# Altium PCB CMV4000.PcbDoc
Units mil, origin at the board's own origin, x right, y up, seen from the top; angles counter-clockwise.
Board outline 3836 x 6365.96 mil, 4 copper layers (LVDS, GND, VDD33, CMOS), stack 33.032 mil thick; 49 components, 45 nets, 1115 pads, 60 vias.
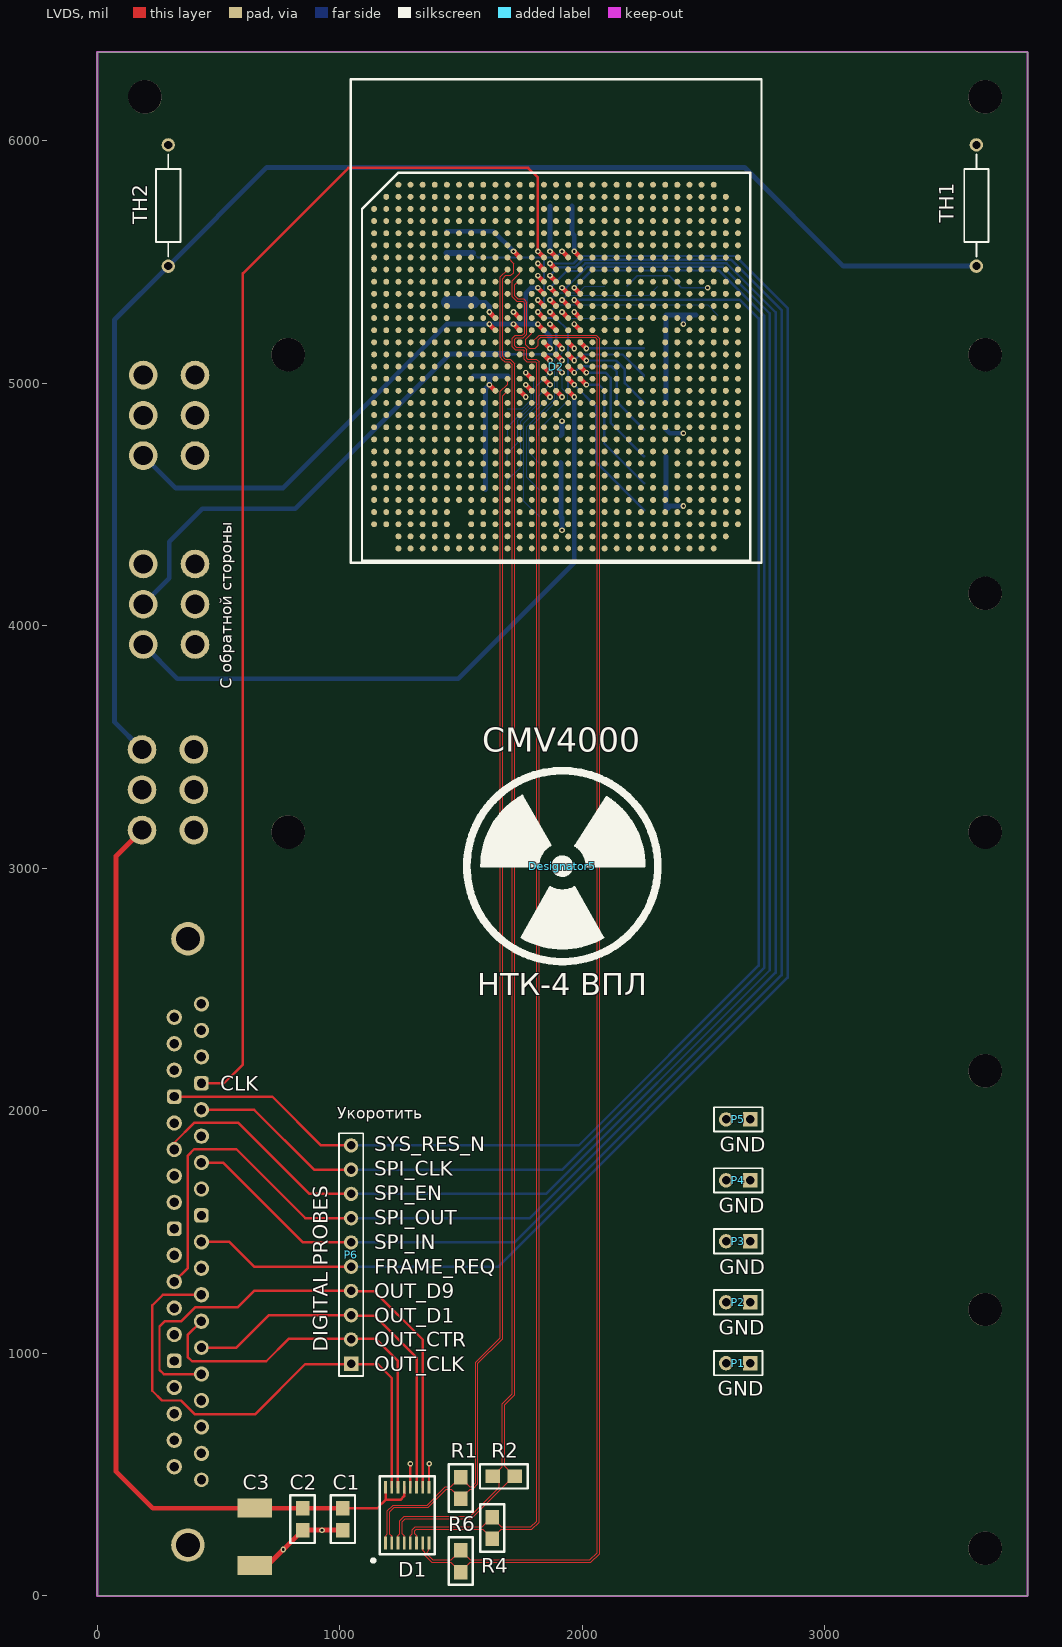
[diagram p0: LVDS view]
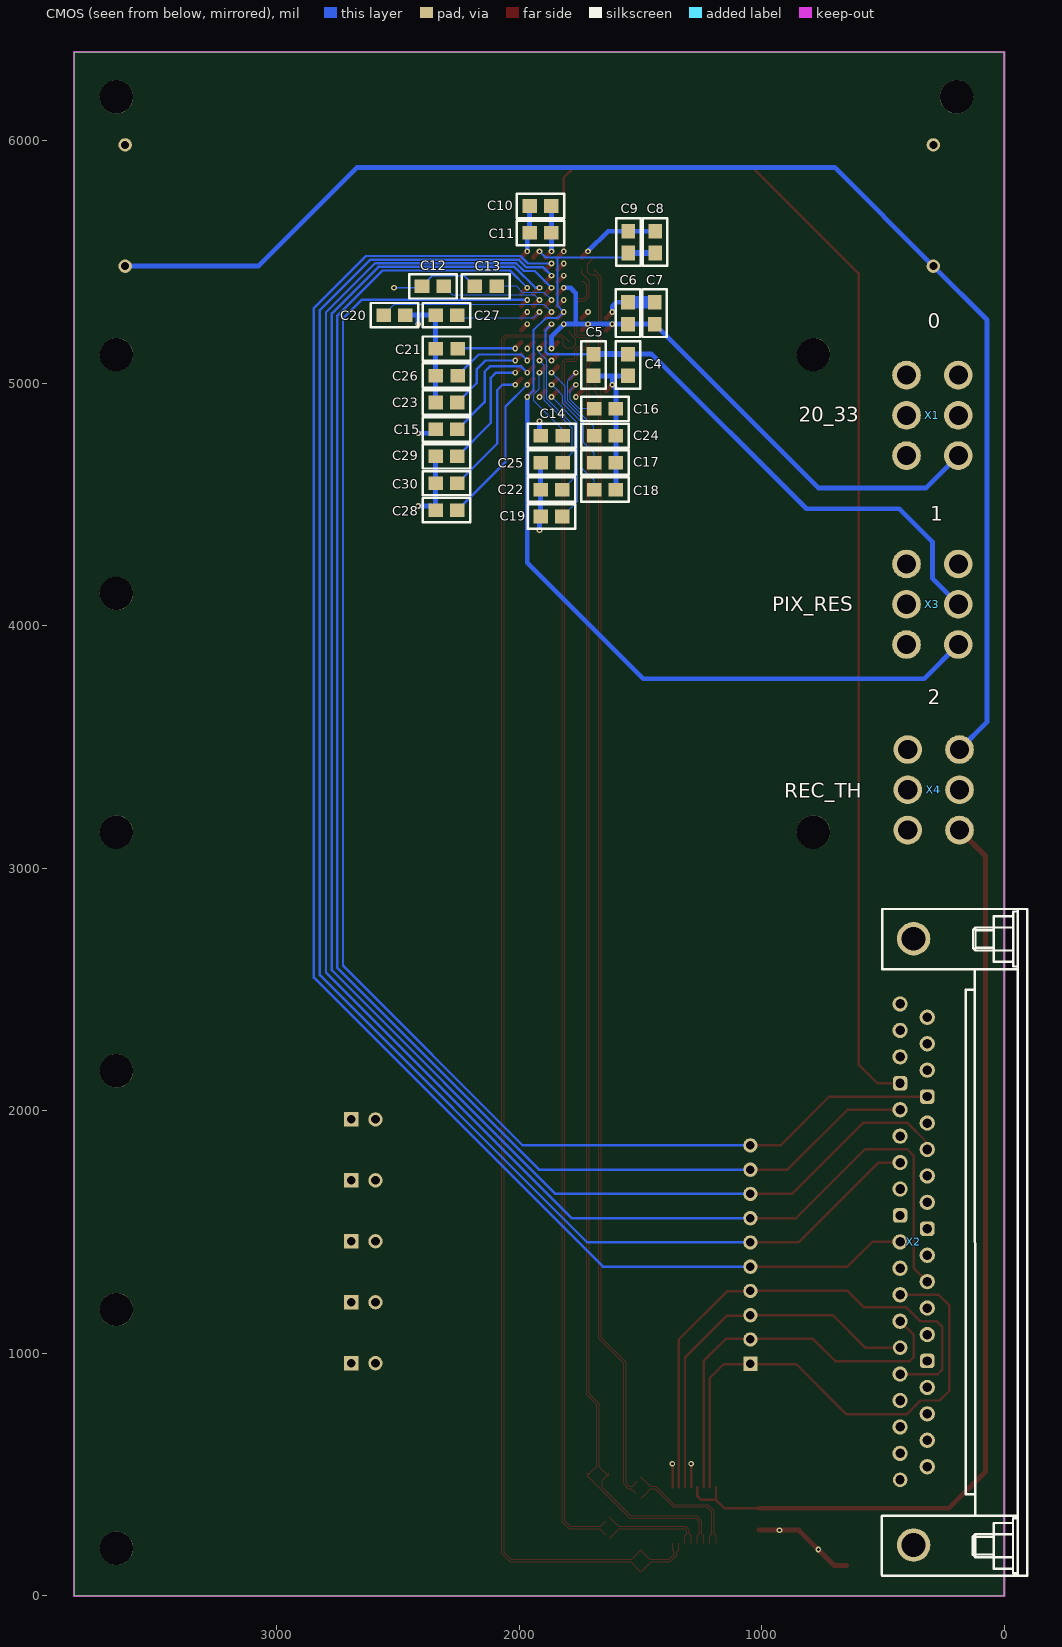
[diagram p1: CMOS view, seen from below]
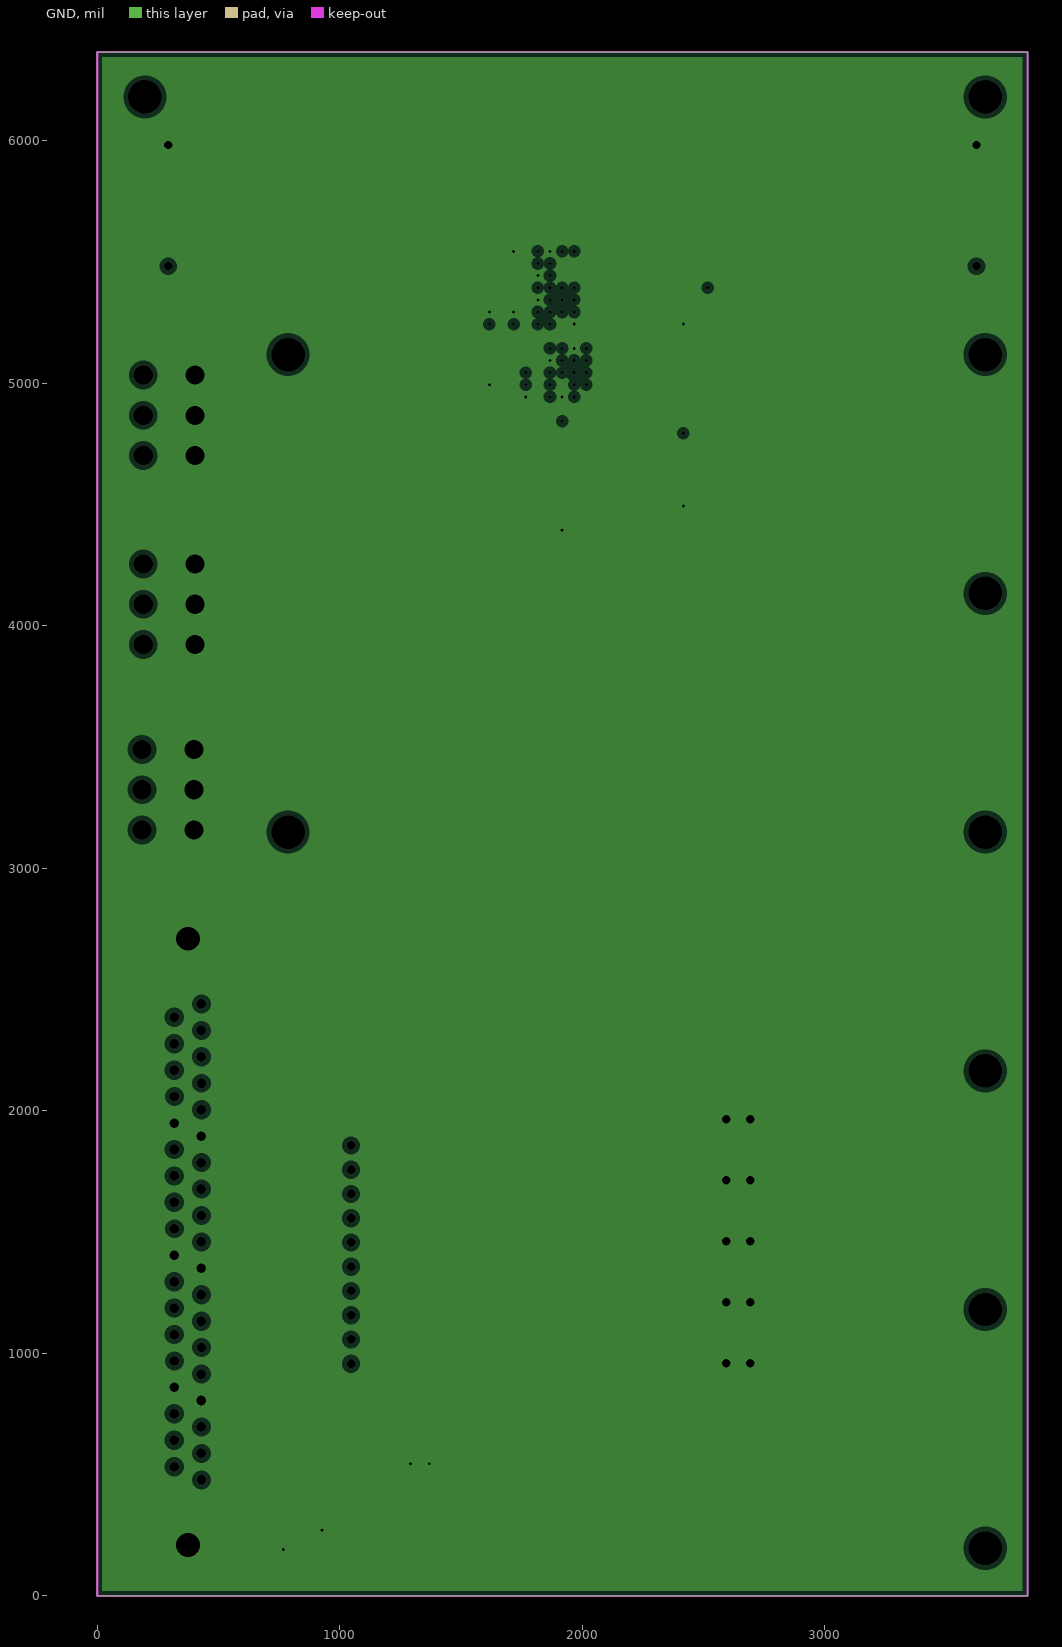
[diagram p2: GND, clearances drawn from the general rule]
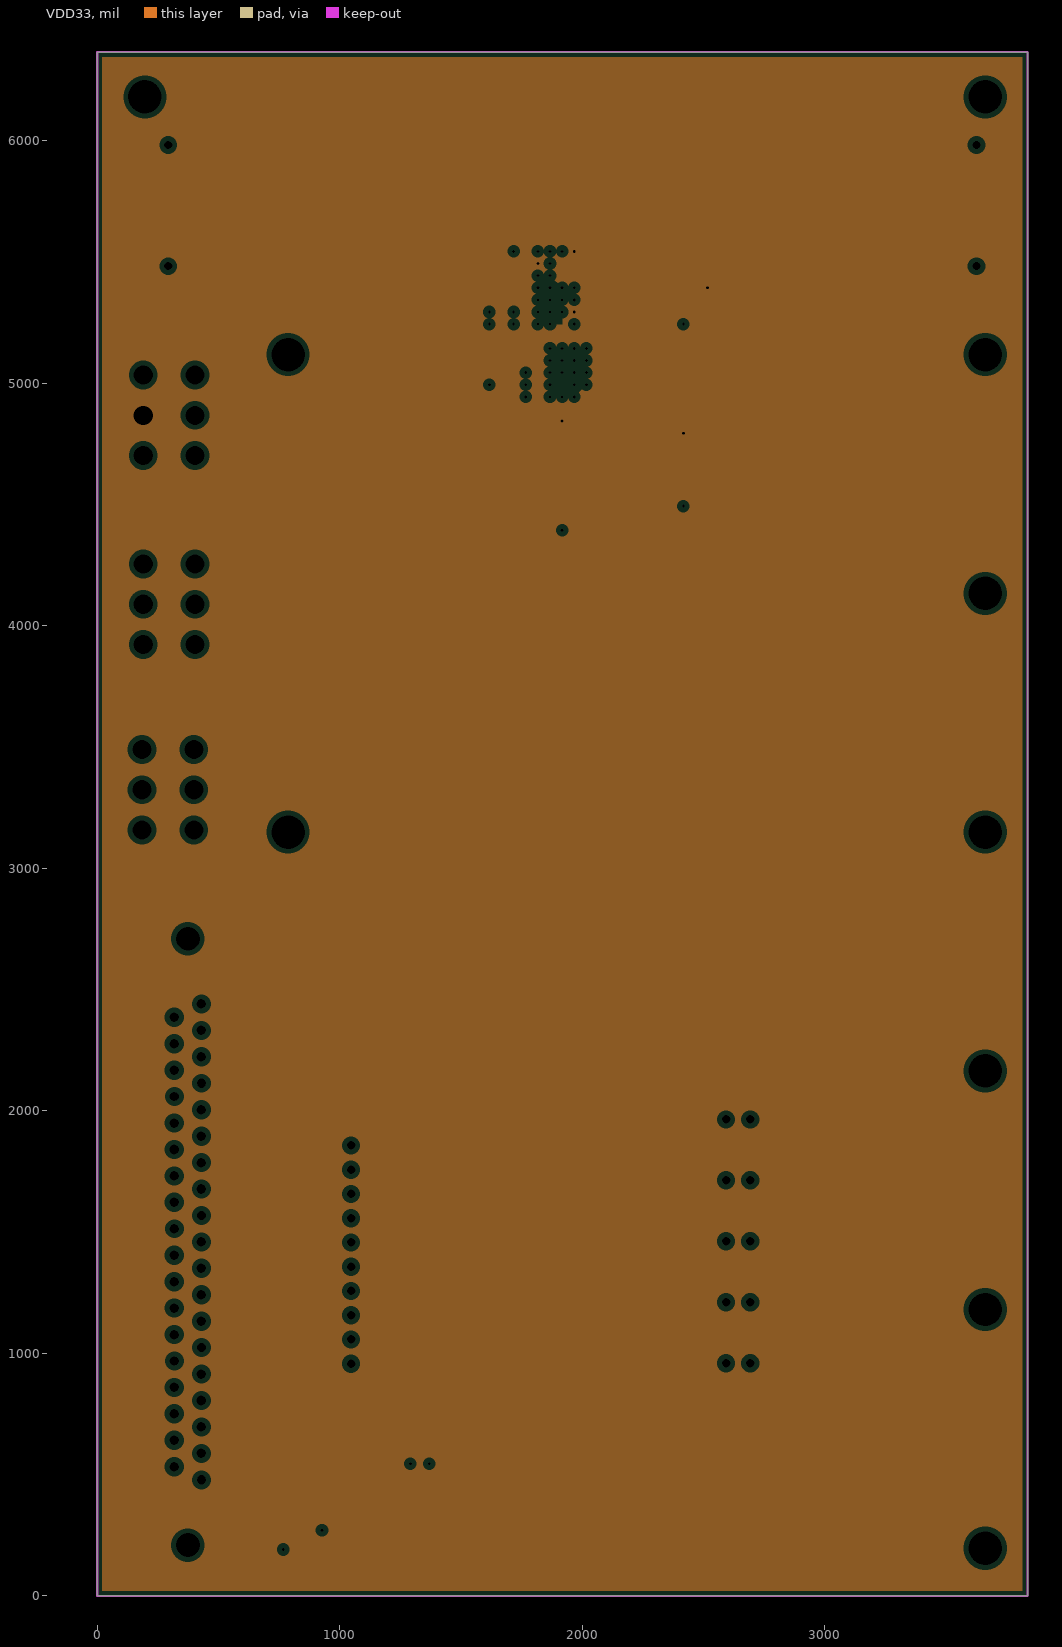
[diagram p3: VDD33, clearances drawn from the general rule]

## Layer stack, top to bottom
Top Solder: solder mask 0.4, Solder Resist, Dk 3.5
LVDS: signal copper 0.7087
Dielectric 1: core 5.9055, FR-4, Dk 4.6
GND: plane copper 0.7087, net GND
Dielectric 2: prepreg 5, FR-4, Dk 4.2
VDD33: plane copper 10, net VDD33
Dielectric4: core 10, FR-4, Dk 4.2
CMOS: signal copper 0.7087
Bottom Solder: solder mask 0.4, Solder Resist, Dk 3.5

## Board outline
0,0 3836,0 3836,6365.96 0,6365.96

## Design rules (kind name [scope] priority, off if disabled: settings)
Clearance [All] p1: gap=5
DiffPairsRouting [All] p1: maxlimit=10 minlimit=5 mostfreqgap=10 toplayer_maxgap=5 toplayer_prefgap=5 toplayer_minwidth=5 toplayer_maxwidth=5 toplayer_prefwidth=5 bottomlayer_mingap=10 bottomlayer_minwidth=15 bottomlayer_maxwidth=15 bottomlayer_prefwidth=15 maxuncoupledlength=500
HoleSize [All] p1: absolutevalues=TRUE maxlimit=808.66 minlimit=1 maxpercent=80.000 minpercent=20.000
MinimumSolderMaskSliver [All] p1: minsoldermaskwidth=0
PlaneClearance [All] p1: clearance=20
PlaneConnect [All] p1: planeconnectstyle=Relief reliefexpansion=20 reliefentries=4 reliefconductorwidth=10 reliefairgap=10
PolygonConnect [All] p1: connectstyle=Relief reliefconductorwidth=10 reliefentries=4 polygonreliefangle="90 Angle" airgapwidth=10
RoutingVias [All] p1: holewidth=11.81 width=23.62 viastyle="Through Hole" minholewidth=11.81 minwidth=23.62 maxholewidth=11.81 maxwidth=23.62
SolderMaskExpansion [All] p1: expansion=3.94
Width [All] p1: maxlimit=88.74 minlimit=4.92 preferedwidth=10 toplayer_prefwidth=5 bottomlayer_minwidth=5 minimp=50.000000 maximp=50.000000 favimp=50.000000
24 further rules are at their usual default settings.

## Classes and differential pairs
differential pair OUTCTR: +OUTCTR_P -OUTCTR_N
differential pair OUTCLK: +OUTCLK_P -OUTCLK_N
differential pair OUT9: +OUT9_P -OUT9_N
differential pair OUT1: +OUT1_P -OUT1_N

## Components (designator, comment, footprint, x,y, rotation, side; value= is the part's Value field where it differs from the comment)
C1 "0,01" CAP_SMALL 1063,218 r90 top
C2 "0,1" CAP_SMALL 897,218 r90 top
C3 "22,0" Cap_BIG 725,405 r180 top
C4 "0,1" CAP_SMALL 1502,4976.92 r90 bottom
C5 "0,01" CAP_SMALL 1644,4976.92 r90 bottom
C6 "0,1" CAP_SMALL 1602,5387.92 r270 bottom
C7 "0,01" CAP_SMALL 1492,5387.92 r270 bottom
C8 "0,1" CAP_SMALL 1490,5680.92 r270 bottom
C9 "0,01" CAP_SMALL 1600,5680.92 r270 bottom
C10 "0,1" CAP_SMALL 1814.08,5781 r0 bottom
C11 "0,01" CAP_SMALL 1814.08,5670 r0 bottom
C12 "0,1" CAP_SMALL 2455,5349.92 r180 bottom
C13 "0,1" CAP_SMALL 2237,5349.92 r180 bottom
C14 "0,1" CAP_SMALL 1965,4733.92 r180 bottom
C15 "0,1" CAP_SMALL 2399,4759.92 r180 bottom
C16 "0,1" CAP_SMALL 1548,4944.92 r0 bottom
C17 "0,1" CAP_SMALL 1548,4722.92 r0 bottom
C18 "0,1" CAP_SMALL 1548,4611.92 r0 bottom
C19 "0,1" CAP_SMALL 1966,4400.92 r180 bottom
C20 "0,1" CAP_SMALL 2416,5330.92 r0 bottom
C21 "0,1" CAP_SMALL 2398,5092.92 r180 bottom
C22 "0,1" CAP_SMALL 1966,4511.92 r180 bottom
C23 "0,1" CAP_SMALL 2399,4870.92 r180 bottom
C24 "0,1" CAP_SMALL 1548,4833.92 r0 bottom
C25 "0,1" CAP_SMALL 1965,4622.92 r180 bottom
C26 "0,1" CAP_SMALL 2398,4981.92 r180 bottom
C27 "0,1" CAP_SMALL 2399,5230.92 r180 bottom
C28 "0,1" CAP_SMALL 2399,4426.92 r180 bottom
C29 "0,1" CAP_SMALL 2399,4648.92 r180 bottom
C30 "0,1" CAP_SMALL 2399,4537.92 r180 bottom
D1 "SN65LVDS048A" "SN65LVDS048A (4LVDS)" 1189,218 r0 top
D2 "CMV4000" SOCKET_AM2 1192,5768.92 r0 top
Designator5 "Comment" RADIATION 1918,3009 r0 top
P1 "GND" HDR1X2 2693,960 r180 top
P2 "GND" HDR1X2 2693,1211.25 r180 top
P3 "GND" HDR1X2 2693,1462.5 r180 top
P4 "GND" HDR1X2 2693,1713.75 r180 top
P5 "GND" HDR1X2 2693,1965 r180 top
P6 "DIGITAL PROBES" HDR1X10 1047,957.82 r90 top
R1 "100" RES 1548,543 r180 top
R2 "100" RES 1579,542.24 r270 top
R4 "100" RES 1678,378 r180 top
R6 "100" RES 1450,46 r0 top
TH1 "Res Semi" AXIAL-0.5 3625,5733 r90 top
TH2 "Res Semi" AXIAL-0.5 293,5733 r90 top
X1 "20_33" POWER 490,4868 r270 bottom
X2 "FEMALE" CHEAP_CONN_FEMALE 374,2710 r270 bottom
X3 "PIX_RES" POWER 490,4089 r270 bottom
X4 "REC_TH" POWER 485,3324 r270 bottom

## Footprints (in the part's own frame and the unit in brackets; to place one, negate y for a bottom-side part, rotate by r counter-clockwise, add the part's x,y. Pads: shape width x height; smd on the part's side, far side on the other; paste and mask are expansions set on the pad)
AXIAL-0.5 [mm] "Axial Device, Thru-Hole; 2 Leads; 0.5 in Pin Spacing"
  round 1.4 hole 0.85: 1(-6.35,0) 2(6.35,0)
  silkscreen extent -5.33,-1.27 5.33,1.27
Cap_BIG [mm] "FROM_MAX"
  rect 3.6x2 smd: 1(1.905,7.092) 2(1.905,1.092)
  body extent 0,-0.01 3.81,8.19, height 2.54
CAP_SMALL [mil] "FROM_MAX"
  rect 60x55.98 smd: 1(53.71,50) 2(143.71,50)
  silkscreen extent 1,0 197,100, body extent 20,18 178,82, height 100
CHEAP_CONN_FEMALE [mm] "CHEAP_CONN_FEMALE"
  round 1.6 hole 1: 1(6.833,-1.422) 2(9.601,-1.422) 3(12.37,-1.422) 5(17.907,-1.422) 6(20.676,-1.422) 7(23.444,-1.422) 8(26.213,-1.422) 10(31.75,-1.422) 11(34.519,-1.422) 12(37.287,-1.422) 13(40.056,-1.422) 15(45.593,-1.422) 16(48.362,-1.422) 17(51.13,-1.422) 18(53.899,-1.422) 20(8.23,1.422) 21(10.998,1.422) 22(13.767,1.422) 24(19.304,1.422) 25(22.073,1.422) 26(24.841,1.422) 27(27.61,1.422) 29(33.147,1.422) 30(35.916,1.422) 31(38.684,1.422) 32(41.453,1.422) 34(46.99,1.422) 35(49.759,1.422) 36(52.527,1.422) 37(55.296,1.422)
  rrect50% 1.524x1.524 hole 0.965: 4(15.138,-1.422) 9(28.981,-1.422) 23(16.535,1.422) 28(30.378,1.422) 33(44.221,1.422)
  round 1.524 hole 0.965: 14(42.824,-1.422) 19(56.667,-1.422)
  round 3.5 hole 2.5: 38(0,0) 39(63.5,0)
  silkscreen extent -3.11,-3.36 66.72,11.92
HDR1X2 [mm] "Connector; Header; 2 Position"
  rect 1.5x1.5 hole 0.9: 1(0,0)
  round 1.5 hole 0.9: 2(2.54,0)
  silkscreen extent -1.27,-1.27 3.81,1.27
HDR1X10 [mm] "Connector; Header; 10 Position"
  rect 1.5x1.5 hole 0.9: 1(0,0)
  round 1.5 hole 0.9: 2(2.54,0) 3(5.08,0) 4(7.62,0) 5(10.16,0) 6(12.7,0) 7(15.24,0) 8(17.78,0) 9(20.32,0) 10(22.86,0)
  silkscreen extent -1.27,-1.27 24.13,1.27
POWER [mm] "POWER"
  round 3 hole 2: 1(4.217,7.62) 2(0,7.62) 3(-4.217,7.62) 4(4.217,2.198) 5(0,2.198) 6(-4.217,2.198)
RADIATION [mil]
  silkscreen extent -394,-394 394,394
RES [mil] "FROM_MAX"
  rect 55.98x60 smd: 1(49,52.71) 2(49,142.71)
  silkscreen extent -1,0 99,196, body extent 17,19 81,177, height 100
"SN65LVDS048A (4LVDS)" [mm]
  rect 0.28x1.35 smd: 1(0,0) 2(0.65,0) 3(1.3,0) 4(1.95,0) 5(2.6,0) 6(3.25,0) 7(3.9,0) 8(4.55,0) 9(4.55,5.85) 10(3.9,5.85) 11(3.25,5.85) 12(2.6,5.85) 13(1.95,5.85) 14(1.3,5.85) 15(0.65,5.85) 16(0,5.85)
  silkscreen extent -1.49,-2.03 5.18,7
SOCKET_AM2 [mm]
  round 0.62 smd: A3(1.27,1.27) A4(2.54,1.27) A5(3.81,1.27) A6(5.08,1.27) A7(6.35,1.27) A8(7.62,1.27) A9(8.89,1.27) A10(10.16,1.27) A11(11.43,1.27) A12(12.7,1.27) A13(13.97,1.27) A14(15.24,1.27) A15(16.51,1.27) A16(17.78,1.27) A17(19.05,1.27) A18(20.32,1.27) A19(21.59,1.27) A20(22.86,1.27) A21(24.13,1.27) A22(25.4,1.27) A23(26.67,1.27) A24(27.94,1.27) A25(29.21,1.27) A26(30.48,1.27) A27(31.75,1.27) A28(33.02,1.27) A29(34.29,1.27) AA1(-1.27,-24.13) AA2(0,-24.13) AA3(1.27,-24.13) AA4(2.54,-24.13) AA5(3.81,-24.13) AA6(5.08,-24.13) AA7(6.35,-24.13) AA8(7.62,-24.13) AA9(8.89,-24.13) AA10(10.16,-24.13) AA11(11.43,-24.13) AA12(12.7,-24.13) AA13(13.97,-24.13) AA14(15.24,-24.13) AA15(16.51,-24.13) AA16(17.78,-24.13) AA17(19.05,-24.13) AA18(20.32,-24.13) AA19(21.59,-24.13) AA20(22.86,-24.13) AA21(24.13,-24.13) AA22(25.4,-24.13) AA23(26.67,-24.13) AA24(27.94,-24.13) AA25(29.21,-24.13) AA26(30.48,-24.13) AA27(31.75,-24.13) AA28(33.02,-24.13) AA29(34.29,-24.13) AA30(35.56,-24.13) AA31(36.83,-24.13) AB1(-1.27,-25.4) AB2(0,-25.4) AB3(1.27,-25.4) AB4(2.54,-25.4) AB5(3.81,-25.4) AB6(5.08,-25.4) AB7(6.35,-25.4) AB8(7.62,-25.4) AB9(8.89,-25.4) AB10(10.16,-25.4) AB11(11.43,-25.4) AB12(12.7,-25.4) AB13(13.97,-25.4) AB14(15.24,-25.4) AB15(16.51,-25.4) AB16(17.78,-25.4) AB17(19.05,-25.4) AB18(20.32,-25.4) AB19(21.59,-25.4) AB20(22.86,-25.4) AB21(24.13,-25.4) AB22(25.4,-25.4) AB23(26.67,-25.4) AB24(27.94,-25.4) AB25(29.21,-25.4) AB26(30.48,-25.4) AB27(31.75,-25.4) AB28(33.02,-25.4) AB29(34.29,-25.4) AB30(35.56,-25.4) AB31(36.83,-25.4) AC1(-1.27,-26.67) AC2(0,-26.67) AC3(1.27,-26.67) AC4(2.54,-26.67) AC5(3.81,-26.67) AC6(5.08,-26.67) AC7(6.35,-26.67) AC8(7.62,-26.67) AC9(8.89,-26.67) AC10(10.16,-26.67) AC11(11.43,-26.67) AC12(12.7,-26.67) AC13(13.97,-26.67) AC14(15.24,-26.67) AC15(16.51,-26.67) AC16(17.78,-26.67) AC17(19.05,-26.67) AC18(20.32,-26.67) AC19(21.59,-26.67) AC20(22.86,-26.67) AC21(24.13,-26.67) AC22(25.4,-26.67) AC23(26.67,-26.67) AC24(27.94,-26.67) AC25(29.21,-26.67) AC26(30.48,-26.67) AC27(31.75,-26.67) AC28(33.02,-26.67) AC29(34.29,-26.67) AC30(35.56,-26.67) AC31(36.83,-26.67) AD1(-1.27,-27.94) AD2(0,-27.94) AD3(1.27,-27.94) AD4(2.54,-27.94) AD5(3.81,-27.94) AD6(5.08,-27.94) AD7(6.35,-27.94) AD8(7.62,-27.94) AD9(8.89,-27.94) AD10(10.16,-27.94) AD11(11.43,-27.94) AD12(12.7,-27.94) AD13(13.97,-27.94) AD14(15.24,-27.94) AD15(16.51,-27.94) AD16(17.78,-27.94) AD17(19.05,-27.94) AD18(20.32,-27.94) AD19(21.59,-27.94) AD20(22.86,-27.94) AD21(24.13,-27.94) AD22(25.4,-27.94) AD23(26.67,-27.94) AD24(27.94,-27.94) AD26(30.48,-27.94) AD27(31.75,-27.94) AD28(33.02,-27.94) AD29(34.29,-27.94) AD30(35.56,-27.94) AD31(36.83,-27.94) AE1(-1.27,-29.21) AE2(0,-29.21) AE3(1.27,-29.21) AE4(2.54,-29.21) AE5(3.81,-29.21) AE6(5.08,-29.21) AE7(6.35,-29.21) AE8(7.62,-29.21) AE9(8.89,-29.21) AE10(10.16,-29.21) AE11(11.43,-29.21) AE12(12.7,-29.21) AE13(13.97,-29.21) AE14(15.24,-29.21) AE15(16.51,-29.21) AE16(17.78,-29.21) AE17(19.05,-29.21) AE18(20.32,-29.21) AE19(21.59,-29.21) AE20(22.86,-29.21) AE21(24.13,-29.21) AE22(25.4,-29.21) AE23(26.67,-29.21) AE24(27.94,-29.21) AE26(30.48,-29.21) AE27(31.75,-29.21) AE28(33.02,-29.21) AE29(34.29,-29.21) AE30(35.56,-29.21) AE31(36.83,-29.21) AF1(-1.27,-30.48) AF2(0,-30.48) AF3(1.27,-30.48) AF4(2.54,-30.48) AF5(3.81,-30.48) AF6(5.08,-30.48) AF7(6.35,-30.48) AF8(7.62,-30.48) AF9(8.89,-30.48) AF10(10.16,-30.48) AF11(11.43,-30.48) AF12(12.7,-30.48) AF13(13.97,-30.48) AF14(15.24,-30.48) AF15(16.51,-30.48) AF16(17.78,-30.48) AF17(19.05,-30.48) AF18(20.32,-30.48) AF19(21.59,-30.48) AF20(22.86,-30.48) AF21(24.13,-30.48) AF22(25.4,-30.48) AF23(26.67,-30.48) AF24(27.94,-30.48) AF25(29.21,-30.48) AF26(30.48,-30.48) AF27(31.75,-30.48) AF28(33.02,-30.48) AF29(34.29,-30.48) AF30(35.56,-30.48) AF31(36.83,-30.48) AG1(-1.27,-31.75) AG2(0,-31.75) AG3(1.27,-31.75) AG4(2.54,-31.75) AG5(3.81,-31.75) AG6(5.08,-31.75) AG7(6.35,-31.75) AG8(7.62,-31.75) AG9(8.89,-31.75) AG10(10.16,-31.75) AG11(11.43,-31.75) AG12(12.7,-31.75) AG13(13.97,-31.75) AG14(15.24,-31.75) AG15(16.51,-31.75) AG16(17.78,-31.75) AG17(19.05,-31.75) AG18(20.32,-31.75) AG19(21.59,-31.75) AG20(22.86,-31.75) AG21(24.13,-31.75) AG22(25.4,-31.75) AG23(26.67,-31.75) AG24(27.94,-31.75) AG25(29.21,-31.75) AG26(30.48,-31.75) AG27(31.75,-31.75) AG28(33.02,-31.75) AG29(34.29,-31.75) AG30(35.56,-31.75) AG31(36.83,-31.75) AH1(-1.27,-33.02) AH2(0,-33.02) AH3(1.27,-33.02) AH4(2.54,-33.02) AH5(3.81,-33.02) AH6(5.08,-33.02) AH7(6.35,-33.02) AH9(8.89,-33.02) AH10(10.16,-33.02) AH11(11.43,-33.02) AH12(12.7,-33.02) AH13(13.97,-33.02) AH14(15.24,-33.02) AH15(16.51,-33.02) AH16(17.78,-33.02) AH17(19.05,-33.02) AH18(20.32,-33.02) AH19(21.59,-33.02) AH20(22.86,-33.02) AH21(24.13,-33.02) AH22(25.4,-33.02) AH23(26.67,-33.02) AH24(27.94,-33.02) AH25(29.21,-33.02) AH26(30.48,-33.02) AH27(31.75,-33.02) AH28(33.02,-33.02) AH29(34.29,-33.02) AH30(35.56,-33.02) AH31(36.83,-33.02) AJ1(-1.27,-34.29) AJ2(0,-34.29) AJ3(1.27,-34.29) AJ4(2.54,-34.29) AJ5(3.81,-34.29) AJ6(5.08,-34.29) AJ7(6.35,-34.29) AJ9(8.89,-34.29) AJ10(10.16,-34.29) AJ11(11.43,-34.29) AJ12(12.7,-34.29) AJ13(13.97,-34.29) AJ14(15.24,-34.29) AJ15(16.51,-34.29) AJ16(17.78,-34.29) AJ17(19.05,-34.29) AJ18(20.32,-34.29) AJ19(21.59,-34.29) AJ20(22.86,-34.29) AJ21(24.13,-34.29) AJ22(25.4,-34.29) AJ23(26.67,-34.29) AJ24(27.94,-34.29) AJ25(29.21,-34.29) AJ26(30.48,-34.29) AJ27(31.75,-34.29) AJ28(33.02,-34.29) AJ29(34.29,-34.29) AJ30(35.56,-34.29) AJ31(36.83,-34.29) AK3(1.27,-35.56) AK4(2.54,-35.56) AK5(3.81,-35.56) AK6(5.08,-35.56) AK7(6.35,-35.56) AK8(7.62,-35.56) AK9(8.89,-35.56) AK10(10.16,-35.56) AK11(11.43,-35.56) AK12(12.7,-35.56) AK13(13.97,-35.56) AK14(15.24,-35.56) AK15(16.51,-35.56) AK16(17.78,-35.56) AK17(19.05,-35.56) AK18(20.32,-35.56) AK19(21.59,-35.56) AK20(22.86,-35.56) AK21(24.13,-35.56) AK22(25.4,-35.56) AK23(26.67,-35.56) AK24(27.94,-35.56) AK25(29.21,-35.56) AK26(30.48,-35.56) AK27(31.75,-35.56) AK28(33.02,-35.56) AK29(34.29,-35.56) AK30(35.56,-35.56) AL3(1.27,-36.83) AL4(2.54,-36.83) AL5(3.81,-36.83) AL6(5.08,-36.83) AL7(6.35,-36.83) AL8(7.62,-36.83) AL9(8.89,-36.83) AL10(10.16,-36.83) AL11(11.43,-36.83) AL12(12.7,-36.83) AL13(13.97,-36.83) AL14(15.24,-36.83) AL15(16.51,-36.83) AL16(17.78,-36.83) AL17(19.05,-36.83) AL18(20.32,-36.83) AL19(21.59,-36.83) AL20(22.86,-36.83) AL21(24.13,-36.83) AL22(25.4,-36.83) AL23(26.67,-36.83) AL24(27.94,-36.83) AL25(29.21,-36.83) AL26(30.48,-36.83) AL27(31.75,-36.83) AL28(33.02,-36.83) AL29(34.29,-36.83) B2(0,0) B3(1.27,0) B4(2.54,0) B5(3.81,0) B6(5.08,0) B7(6.35,0) B8(7.62,0) B9(8.89,0) B10(10.16,0) B11(11.43,0) B12(12.7,0) B13(13.97,0) B14(15.24,0) B15(16.51,0) B16(17.78,0) B17(19.05,0) B18(20.32,0) B19(21.59,0) B20(22.86,0) B21(24.13,0) B22(25.4,0) B23(26.67,0) B24(27.94,0) B25(29.21,0) B26(30.48,0) B27(31.75,0) B28(33.02,0) B29(34.29,0) B30(35.56,0) C1(-1.27,-1.27) C2(0,-1.27) C3(1.27,-1.27) C4(2.54,-1.27) C5(3.81,-1.27) C6(5.08,-1.27) C7(6.35,-1.27) C8(7.62,-1.27) C9(8.89,-1.27) C10(10.16,-1.27) C11(11.43,-1.27) C12(12.7,-1.27) C13(13.97,-1.27) C14(15.24,-1.27) C15(16.51,-1.27) C16(17.78,-1.27) C17(19.05,-1.27) C18(20.32,-1.27) C19(21.59,-1.27) C20(22.86,-1.27) C21(24.13,-1.27) C22(25.4,-1.27) C23(26.67,-1.27) C24(27.94,-1.27) C25(29.21,-1.27) C26(30.48,-1.27) C27(31.75,-1.27) C28(33.02,-1.27) C29(34.29,-1.27) C30(35.56,-1.27) C31(36.83,-1.27) D1(-1.27,-2.54) D2(0,-2.54) D3(1.27,-2.54) D4(2.54,-2.54) D5(3.81,-2.54) D6(5.08,-2.54) D7(6.35,-2.54) D8(7.62,-2.54) D9(8.89,-2.54) D10(10.16,-2.54) D11(11.43,-2.54) D12(12.7,-2.54) D13(13.97,-2.54) D14(15.24,-2.54) D15(16.51,-2.54) D16(17.78,-2.54) D17(19.05,-2.54) D18(20.32,-2.54) D19(21.59,-2.54) D20(22.86,-2.54) D21(24.13,-2.54) D22(25.4,-2.54) D23(26.67,-2.54) D24(27.94,-2.54) D25(29.21,-2.54) D26(30.48,-2.54) D27(31.75,-2.54) D28(33.02,-2.54) D29(34.29,-2.54) D30(35.56,-2.54) D31(36.83,-2.54) E1(-1.27,-3.81) E2(0,-3.81) E3(1.27,-3.81) E4(2.54,-3.81) E5(3.81,-3.81) E6(5.08,-3.81) E7(6.35,-3.81) E8(7.62,-3.81) E9(8.89,-3.81) E10(10.16,-3.81) E11(11.43,-3.81) E12(12.7,-3.81) E13(13.97,-3.81) E14(15.24,-3.81) E15(16.51,-3.81) E16(17.78,-3.81) E17(19.05,-3.81) E18(20.32,-3.81) E19(21.59,-3.81) E20(22.86,-3.81) E21(24.13,-3.81) E22(25.4,-3.81) E23(26.67,-3.81) E24(27.94,-3.81) E25(29.21,-3.81) E26(30.48,-3.81) E27(31.75,-3.81) E28(33.02,-3.81) E29(34.29,-3.81) E30(35.56,-3.81) E31(36.83,-3.81) F1(-1.27,-5.08) F2(0,-5.08) F3(1.27,-5.08) F4(2.54,-5.08) F5(3.81,-5.08) F6(5.08,-5.08) F7(6.35,-5.08) F8(7.62,-5.08) F9(8.89,-5.08) F10(10.16,-5.08) F11(11.43,-5.08) F12(12.7,-5.08) F13(13.97,-5.08) F14(15.24,-5.08) F15(16.51,-5.08) F16(17.78,-5.08) F17(19.05,-5.08) F18(20.32,-5.08) F19(21.59,-5.08) F20(22.86,-5.08) F21(24.13,-5.08) F22(25.4,-5.08) F23(26.67,-5.08) F24(27.94,-5.08) F25(29.21,-5.08) F26(30.48,-5.08) F27(31.75,-5.08) F28(33.02,-5.08) F29(34.29,-5.08) F30(35.56,-5.08) F31(36.83,-5.08) G1(-1.27,-6.35) G2(0,-6.35) G3(1.27,-6.35) G4(2.54,-6.35) G5(3.81,-6.35) G6(5.08,-6.35) G7(6.35,-6.35) G8(7.62,-6.35) G9(8.89,-6.35) G10(10.16,-6.35) G11(11.43,-6.35) G12(12.7,-6.35) G13(13.97,-6.35) G14(15.24,-6.35) G15(16.51,-6.35) G16(17.78,-6.35) G17(19.05,-6.35) G18(20.32,-6.35) G19(21.59,-6.35) G20(22.86,-6.35) G21(24.13,-6.35) G22(25.4,-6.35) G23(26.67,-6.35) G24(27.94,-6.35) G25(29.21,-6.35) G26(30.48,-6.35) G27(31.75,-6.35) G28(33.02,-6.35) G29(34.29,-6.35) G30(35.56,-6.35) G31(36.83,-6.35) H1(-1.27,-7.62) H2(0,-7.62) H3(1.27,-7.62) H4(2.54,-7.62) H5(3.81,-7.62) H6(5.08,-7.62) H7(6.35,-7.62) H8(7.62,-7.62) H9(8.89,-7.62) H10(10.16,-7.62) H11(11.43,-7.62) H12(12.7,-7.62) H13(13.97,-7.62) H14(15.24,-7.62) H15(16.51,-7.62) H16(17.78,-7.62) H17(19.05,-7.62) H18(20.32,-7.62) H19(21.59,-7.62) H20(22.86,-7.62) H21(24.13,-7.62) H22(25.4,-7.62) H23(26.67,-7.62) H24(27.94,-7.62) H25(29.21,-7.62) H26(30.48,-7.62) H27(31.75,-7.62) H28(33.02,-7.62) H29(34.29,-7.62) H30(35.56,-7.62) H31(36.83,-7.62) J1(-1.27,-8.89) J2(0,-8.89) J3(1.27,-8.89) J4(2.54,-8.89) J5(3.81,-8.89) J6(5.08,-8.89) J7(6.35,-8.89) J8(7.62,-8.89) J9(8.89,-8.89) J10(10.16,-8.89) J11(11.43,-8.89) J12(12.7,-8.89) J13(13.97,-8.89) J14(15.24,-8.89) J15(16.51,-8.89) J16(17.78,-8.89) J17(19.05,-8.89) J18(20.32,-8.89) J19(21.59,-8.89) J20(22.86,-8.89) J21(24.13,-8.89) J22(25.4,-8.89) J23(26.67,-8.89) J24(27.94,-8.89) J25(29.21,-8.89) J26(30.48,-8.89) J27(31.75,-8.89) J28(33.02,-8.89) J29(34.29,-8.89) J30(35.56,-8.89) J31(36.83,-8.89) K1(-1.27,-10.16) K2(0,-10.16) K3(1.27,-10.16) K4(2.54,-10.16) K5(3.81,-10.16) K6(5.08,-10.16) K7(6.35,-10.16) K8(7.62,-10.16) K9(8.89,-10.16) K10(10.16,-10.16) K11(11.43,-10.16) K12(12.7,-10.16) K13(13.97,-10.16) K14(15.24,-10.16) K15(16.51,-10.16) K16(17.78,-10.16) K17(19.05,-10.16) K18(20.32,-10.16) K19(21.59,-10.16) K20(22.86,-10.16) K21(24.13,-10.16) K22(25.4,-10.16) K23(26.67,-10.16) K24(27.94,-10.16) K25(29.21,-10.16) K26(30.48,-10.16) K27(31.75,-10.16) K28(33.02,-10.16) K29(34.29,-10.16) K30(35.56,-10.16) K31(36.83,-10.16) L1(-1.27,-11.43) L2(0,-11.43) L3(1.27,-11.43) L4(2.54,-11.43) L5(3.81,-11.43) L6(5.08,-11.43) L7(6.35,-11.43) L9(8.89,-11.43) L10(10.16,-11.43) L11(11.43,-11.43) L12(12.7,-11.43) L13(13.97,-11.43) L14(15.24,-11.43) L15(16.51,-11.43) L16(17.78,-11.43) L17(19.05,-11.43) L18(20.32,-11.43) L19(21.59,-11.43) L20(22.86,-11.43) L21(24.13,-11.43) L22(25.4,-11.43) L23(26.67,-11.43) L24(27.94,-11.43) L25(29.21,-11.43) L26(30.48,-11.43) L27(31.75,-11.43) L28(33.02,-11.43) L29(34.29,-11.43) L30(35.56,-11.43) L31(36.83,-11.43) M1(-1.27,-12.7) M2(0,-12.7) M3(1.27,-12.7) M4(2.54,-12.7) M5(3.81,-12.7) M6(5.08,-12.7) M7(6.35,-12.7) M9(8.89,-12.7) M10(10.16,-12.7) M11(11.43,-12.7) M12(12.7,-12.7) M13(13.97,-12.7) M14(15.24,-12.7) M15(16.51,-12.7) M16(17.78,-12.7) M17(19.05,-12.7) M18(20.32,-12.7) M19(21.59,-12.7) M20(22.86,-12.7) M21(24.13,-12.7) M22(25.4,-12.7) M23(26.67,-12.7) M24(27.94,-12.7) M25(29.21,-12.7) M26(30.48,-12.7) M27(31.75,-12.7) M28(33.02,-12.7) M29(34.29,-12.7) M30(35.56,-12.7) M31(36.83,-12.7) N1(-1.27,-13.97) N2(0,-13.97) N3(1.27,-13.97) N4(2.54,-13.97) N5(3.81,-13.97) N6(5.08,-13.97) N7(6.35,-13.97) N8(7.62,-13.97) N9(8.89,-13.97) N10(10.16,-13.97) N11(11.43,-13.97) N12(12.7,-13.97) N13(13.97,-13.97) N14(15.24,-13.97) N15(16.51,-13.97) N16(17.78,-13.97) N17(19.05,-13.97) N18(20.32,-13.97) N19(21.59,-13.97) N20(22.86,-13.97) N21(24.13,-13.97) N22(25.4,-13.97) N23(26.67,-13.97) N25(29.21,-13.97) N26(30.48,-13.97) N27(31.75,-13.97) N28(33.02,-13.97) N29(34.29,-13.97) N30(35.56,-13.97) N31(36.83,-13.97) P1(-1.27,-15.24) P2(0,-15.24) P3(1.27,-15.24) P4(2.54,-15.24) P5(3.81,-15.24) P6(5.08,-15.24) P7(6.35,-15.24) P8(7.62,-15.24) P9(8.89,-15.24) P10(10.16,-15.24) P11(11.43,-15.24) P12(12.7,-15.24) P13(13.97,-15.24) P14(15.24,-15.24) P15(16.51,-15.24) P16(17.78,-15.24) P17(19.05,-15.24) P18(20.32,-15.24) P19(21.59,-15.24) P20(22.86,-15.24) P21(24.13,-15.24) P22(25.4,-15.24) P23(26.67,-15.24) P25(29.21,-15.24) P26(30.48,-15.24) P27(31.75,-15.24) P28(33.02,-15.24) P29(34.29,-15.24) P30(35.56,-15.24) P31(36.83,-15.24) R1(-1.27,-16.51) R2(0,-16.51) R3(1.27,-16.51) R4(2.54,-16.51) R5(3.81,-16.51) R6(5.08,-16.51) R7(6.35,-16.51) R8(7.62,-16.51) R9(8.89,-16.51) R10(10.16,-16.51) R11(11.43,-16.51) R12(12.7,-16.51) R13(13.97,-16.51) R14(15.24,-16.51) R15(16.51,-16.51) R16(17.78,-16.51) R17(19.05,-16.51) R18(20.32,-16.51) R19(21.59,-16.51) R20(22.86,-16.51) R21(24.13,-16.51) R22(25.4,-16.51) R23(26.67,-16.51) R24(27.94,-16.51) R25(29.21,-16.51) R26(30.48,-16.51) R27(31.75,-16.51) R28(33.02,-16.51) R29(34.29,-16.51) R30(35.56,-16.51) R31(36.83,-16.51) T1(-1.27,-17.78) T2(0,-17.78) T3(1.27,-17.78) T4(2.54,-17.78) T5(3.81,-17.78) T6(5.08,-17.78) T7(6.35,-17.78) T8(7.62,-17.78) T9(8.89,-17.78) T10(10.16,-17.78) T11(11.43,-17.78) T12(12.7,-17.78) T13(13.97,-17.78) T14(15.24,-17.78) T15(16.51,-17.78) T16(17.78,-17.78) T17(19.05,-17.78) T18(20.32,-17.78) T19(21.59,-17.78) T20(22.86,-17.78) T21(24.13,-17.78) T22(25.4,-17.78) T23(26.67,-17.78) T24(27.94,-17.78) T25(29.21,-17.78) T26(30.48,-17.78) T27(31.75,-17.78) T28(33.02,-17.78) T29(34.29,-17.78) T30(35.56,-17.78) T31(36.83,-17.78) U1(-1.27,-19.05) U2(0,-19.05) U3(1.27,-19.05) U4(2.54,-19.05) U5(3.81,-19.05) U6(5.08,-19.05) U7(6.35,-19.05) U8(7.62,-19.05) U9(8.89,-19.05) U10(10.16,-19.05) U11(11.43,-19.05) U12(12.7,-19.05) U13(13.97,-19.05) U14(15.24,-19.05) U15(16.51,-19.05) U16(17.78,-19.05) U17(19.05,-19.05) U18(20.32,-19.05) U19(21.59,-19.05) U20(22.86,-19.05) U21(24.13,-19.05) U22(25.4,-19.05) U23(26.67,-19.05) U24(27.94,-19.05) U25(29.21,-19.05) U26(30.48,-19.05) U27(31.75,-19.05) U28(33.02,-19.05) U29(34.29,-19.05) U30(35.56,-19.05) U31(36.83,-19.05) V1(-1.27,-20.32) V2(0,-20.32) V3(1.27,-20.32) V4(2.54,-20.32) V5(3.81,-20.32) V6(5.08,-20.32) V7(6.35,-20.32) V8(7.62,-20.32) V9(8.89,-20.32) V10(10.16,-20.32) V11(11.43,-20.32) V12(12.7,-20.32) V13(13.97,-20.32) V14(15.24,-20.32) V15(16.51,-20.32) V16(17.78,-20.32) V17(19.05,-20.32) V18(20.32,-20.32) V19(21.59,-20.32) V20(22.86,-20.32) V21(24.13,-20.32) V22(25.4,-20.32) V23(26.67,-20.32) V24(27.94,-20.32) V25(29.21,-20.32) V26(30.48,-20.32) V27(31.75,-20.32) V28(33.02,-20.32) V29(34.29,-20.32) V30(35.56,-20.32) V31(36.83,-20.32) W1(-1.27,-21.59) W2(0,-21.59) W3(1.27,-21.59) W4(2.54,-21.59) W5(3.81,-21.59) W6(5.08,-21.59) W7(6.35,-21.59) W8(7.62,-21.59) W9(8.89,-21.59) W10(10.16,-21.59) W11(11.43,-21.59) W12(12.7,-21.59) W13(13.97,-21.59) W14(15.24,-21.59) W15(16.51,-21.59) W16(17.78,-21.59) W17(19.05,-21.59) W18(20.32,-21.59) W19(21.59,-21.59) W20(22.86,-21.59) W21(24.13,-21.59) W22(25.4,-21.59) W23(26.67,-21.59) W24(27.94,-21.59) W25(29.21,-21.59) W26(30.48,-21.59) W27(31.75,-21.59) W28(33.02,-21.59) W29(34.29,-21.59) W30(35.56,-21.59) W31(36.83,-21.59) Y1(-1.27,-22.86) Y2(0,-22.86) Y3(1.27,-22.86) Y4(2.54,-22.86) Y5(3.81,-22.86) Y6(5.08,-22.86) Y7(6.35,-22.86) Y8(7.62,-22.86) Y9(8.89,-22.86) Y10(10.16,-22.86) Y11(11.43,-22.86) Y12(12.7,-22.86) Y13(13.97,-22.86) Y14(15.24,-22.86) Y15(16.51,-22.86) Y16(17.78,-22.86) Y17(19.05,-22.86) Y18(20.32,-22.86) Y19(21.59,-22.86) Y20(22.86,-22.86) Y21(24.13,-22.86) Y22(25.4,-22.86) Y23(26.67,-22.86) Y24(27.94,-22.86) Y25(29.21,-22.86) Y26(30.48,-22.86) Y27(31.75,-22.86) Y28(33.02,-22.86) Y29(34.29,-22.86) Y30(35.56,-22.86) Y31(36.83,-22.86)
  silkscreen extent -2.54,-38.1 38.1,2.54

## Part data
C1 C2 C4 C5 C6 C7 C8 C9 C10 C11 C12 C13 C14 C15 C16 C17 C18 C19 C20 C21 C22 C23 C24 C25 C26 C27 C28 C29 C30: library part CAP_SMALL
C3: library part CAP_BIG
D1: library part "SN65LVDS048A (4LVDS)"
P1 P2 P3 P4 P5: library part "Header 2", "Header, 2-Pin"
P6: library part "Header 10", "Header, 10-Pin"
R1 R2 R4 R6: library part RES
TH1 TH2: "Semiconductor Resistor"
X1 X3 X4: library part POWER
X2: library part CHEAP_CON_37_FEMALE

## Free pads (board coordinates)
  round 137.8 hole 137.8 mask+0: 0(196.85,6181.1) 0(787.4,3149.61) 0(787.4,5118.11) 0(3661.42,6181.1) 0(3661.42,196.85) 0(3661.42,1181.1) 0(3661.42,2165.35) 0(3661.42,3149.61) 0(3661.42,4133.86) 0(3661.42,5118.11)

## Via types
v1: diameter 23.62, hole 11.81, LVDS to CMOS, 60 vias

## Nets (pads, with @x,y where several pads share a name; then routed paths per layer and width w, separated by ;. In a path a pad name is that pad's centre, name@x,y a point inside that pad or via, vN(x,y) a via of type N, cw(c..) or ccw(c..) an arc to the next point about the centre after c; other vN are vias at no path point)
3.3V: C1.2 C2.2 C3.2 D1.13 D1.16 X4.1 | length 4049.6
  LVDS w10: 884,362 884.23,361.77 ; C1.2 1154.71,361.71 1189,396 ; D1.16 1189,396 ; D1.13 1265.77,411.77 1250,396 1189,396
  LVDS w20: X4.1 78,3050.96 78,513 229,362 C3.2 650.29,361.71 C2.2 C1.2
ADC: C15.2 D2.T17 | length 515.8
  LVDS w20: D2.T17 v1(1967,5043.92)
  CMOS w10: v1(1967,5043.92) 1993,5069.92 2121,5069.92 2143,5047.92 2143,4922.21 C15.2
CLK_IN: D2.G15 X2.4 | length 5216.5
  LVDS w10: X2.4 523,2114 601,2192 601,5453 1036,5888 1777,5888 1817,5848 v1(1817,5543.92)
  LVDS w20: v1(1817,5543.92) D2.G15
CMD_N: C27.2 D2.M17 | length 388.9
  LVDS w20: v1(1917,5293.92) D2.M17
  CMOS w5: v1(1917,5293.92) 1941.92,5269 2243.37,5269 C27.2
CMD_P: C12.2 D2.L17 | length 452.8
  LVDS w20: v1(1917,5343.92) D2.L17
  CMOS w5: v1(1917,5343.92) 1937,5363.92 2275.29,5363.92 C12.2
CMD_P_INV: C13.2 D2.L16 | length 284.8
  LVDS w20: v1(1867,5343.92) D2.L16
  CMOS w5: v1(1867,5343.92) 1897,5373.92 1985,5373.92 2011,5399.92 C13.2
COL_AMP: C26.2 D2.R17 | length 369
  LVDS w20: D2.R17 v1(1967,5093.92)
  CMOS w10: v1(1967,5093.92) 1992,5118.92 2167.29,5118.92 C26.2
COL_LOAD: C25.2 D2.R16 | length 529.4
  LVDS w20: D2.R16 v1(1917,5093.92)
  CMOS w5: C25.2 1781,4713.21 1781,4814.92 1897,4930.92 1897,5073.92 v1(1917,5093.92)
COL_PC: C29.2 D2.T18 | length 525.3
  LVDS w20: D2.T18 v1(2017,5043.92)
  CMOS w10: v1(2017,5043.92) 2096,5043.92 2117,5022.92 2117,4837.21 C29.2
FRAME_REQ: D2.H16 P6.5 X2.10 | length 6830.8
  LVDS w10: X2.10 545,1460 647.18,1357.82 P6.5
  LVDS w20: v1(1867,5493.92) D2.H16
  CMOS w10: P6.5 1655.47,1357.82 2847,2549.35 2847,5310 2632,5525 1995,5525 1964,5494 1867.08,5494 v1(1867,5493.92)
GND: C1.1 C2.1 C3.1 C4.1 C5.1 C6.1 C7.1 C8.1 C9.1 C10.1 C11.1 C16.1 C17.1 C18.1 C19.1 C20.1 C21.1 C22.1 C23.1 C24.1 C25.1 C26.1 C27.1 C28.1 C29.1 C30.1 D1.9 D1.12 D2.G13 D2.G16 D2.J15 D2.L15 D2.M11 D2.M13 D2.N18 D2.P17 D2.R15 D2.V11 D2.V13 D2.V16 P1.1 P1.2 P2.1 P2.2 P3.1 P3.2 P4.1 P4.2 P5.1 P5.2 TH1.2 TH2.2 X1.4 X1.5 X1.6 X2.6 X2.11 X2.16 X2.24 X2.29 X2.34 X2.38 X2.39 X3.4 X3.5 X3.6 X4.4 X4.5 X4.6 | length 3468.3
  LVDS w10: D1.12 v1(1291.36,545.36) ; D1.9 1368.13,544.13 v1(1369,545)
  LVDS w20: C3.1 701.07,125.78 C2.1 C1.1 ; v1(1617,4993.92) D2.V11 ; v1(1617,5293.92) D2.M11 ; v1(1717,5293.92) D2.M13 ; v1(1717,5543.92) D2.G13 ; D2.V13 v1(1767,4943.92) ; v1(1817,5343.92) D2.L15 ; v1(1817,5443.92) D2.J15 ; D2.R15 v1(1867,5093.92) ; v1(1867,5543.92) D2.G16 ; D2.V16 v1(1917,4943.92) ; D2.P17 v1(1967,5143.92) ; v1(1967,5243.92) D2.N18
  CMOS w20: C8.1 C9.1 1633.71,5627.21 v1(1717,5543.92) ; C4.1 1620,5030.63 ; C6.1 1600.79,5334.21 1617,5318 v1(1617,5293.92) ; C18.1 C17.1 C24.1 C16.1 1601.71,4978.63 v1(1617,4993.92) 1617,5027.63 1620,5030.63 ; C5.1 1620,5030.63 ; v1(1867,5543.92) 1867.79,5544.71 C11.1 C10.1 ; C25.1 1912.29,4671.92 C19.1 1917,4446.21 v1(1917,4393.92) ; C29.1 C30.1 C28.1 2362.29,4493.92 v1(2417,4493.92) ; C23.1 C27.1 2417,5280.92 ; v1(2417,5243.92) 2417,5280.92 ; C20.1 2417,5280.92
  CMOS w50: C7.1 C6.1
  other v1: 767,191.71 927,271
LVDS: C30.2 D2.U18 | length 570.5
  LVDS w20: D2.U18 v1(2017,4993.92)
  CMOS w10: v1(2017,4993.92) 2069,4993.92 2091,4971.92 2091,4752.21 C30.2
OUT1_N: D1.5 D2.H13 R4.1 | length 5919.8
  LVDS w5: D1.5 1291.36,247.96 1299.16,255.76 1299.16,272.14 1312.02,285 1588.71,285 R4.1 ; R4.1@1646,306 1667,285 1788,285 1812,309 1812,5083.92 1806.7,5089.22 1771.56,5089.22 1761.7,5099.07 1761.7,5134.22 1756.7,5139.22 1723.56,5139.22 1712.3,5150.48 1712.3,5186.36 1724.56,5198.63 1753.52,5198.63 1762,5207.1 1762,5330.82 1753.9,5338.92 1729.99,5338.92 1712,5356.91 1712,5423 1742,5453 D2.H13
OUT1_P: D1.6 D2.J13 R4.2 | length 5872.5
  LVDS w5: D1.6 1316.95,247.96 1309.16,255.76 1309.16,268 1316.16,275 1589.29,275 R4.2 ; R4.2@1644,253 1666,275 1792.14,275 1822,304.86 1822,5088.06 1810.85,5099.22 1775.7,5099.22 1771.7,5103.22 1771.7,5138.36 1760.85,5149.22 1727.7,5149.22 1722.3,5154.63 1722.3,5182.22 1728.7,5188.63 1757.67,5188.63 1772,5202.96 1772,5334.96 1758.04,5348.92 1734.13,5348.92 1722,5361.05 1722,5406.92 1734,5418.92 D2.J13
OUT9_N: D1.8 D2.N14 R6.2 | length 6213.6
  LVDS w5: D1.8 1368.13,187.96 1360.34,180.17 1360.34,173 1384.34,149 1459.29,149 R6.2 1539,148.71 2031.71,148.71 2062,179 2062,5179.82 2052.9,5188.92 1828,5188.92 1818,5178.92 1818,5155.92 1806.08,5144 1781.92,5144 1767,5158.92 1767,5181 1792,5206 D2.N14
OUT9_P: D1.7 D2.P14 R6.1 | length 6142.4
  LVDS w5: D1.7 1342.54,187.96 1350.34,180.17 1350.34,168.86 1380.2,139 1458.71,139 R6.1 1539,138.71 2035.85,138.71 2072,174.86 2072,5183.96 2057.04,5198.92 1822,5198.92 D2.P14
OUT_CLK: D1.15 P6.1 X2.12 | length 2160.7
  LVDS w10: X2.12 271,1242 227,1198 227,846 267,806 346,806 403,749 651,749 858,956 1157,956 1214.59,898.41 D1.15
OUT_CTR: D1.14 P6.2 X2.13 | length 1641.6
  LVDS w10: X2.13 373,1076 373,986 391,968 697,968 789,1060 1149,1060 1240.18,968.82 D1.14
OUT_D1: D1.11 P6.3 X2.14 | length 1548.3
  LVDS w10: X2.14 574,1024 707.82,1157.82 P6.3 ; P6.3@1047,1155 1145,1155 1316.95,983.05 D1.11
OUT_D9: D1.10 P6.4 X2.15 | length 2197.6
  LVDS w10: X2.15 429,914 275,914 257,932 257,1111 278,1132 346,1132 404,1190 579,1190 646.82,1257.82 P6.4 ; P6.4@1047,1256 1144,1256 1342.54,1057.46 D1.10
OUTCLK_N: D1.1 D2.U12 R1.1 | length 5162.6
  LVDS w5: D1.1 1189,247.96 1197,255.96 1197,351.14 1220.86,375 1360,375 1435,450 1458.71,450 R1.1 ; R1.1@1516,472 1537,451 1545,451 1560,466 1560,963.14 1662,1065.14 1662,4966.96 1692,4996.96 D2.U12
OUTCLK_P: D1.2 D2.V12 R1.2 | length 5102.8
  LVDS w5: D1.2 1214.59,247.96 1207,255.55 1207,347 1225,365 1364.14,365 1439.14,440 1459.29,440 R1.2 ; R1.2@1520,423 1538,441 1549.14,441 1570,461.86 1570,959 1672,1061 1672,4948.92 D2.V12
OUTCTR_N: D1.4 D2.G12 R2.2 | length 5774
  LVDS w5: D1.4 1265.77,247.96 1257.98,255.76 1257.98,306.98 1270,319 1543.14,319 1717.39,493.24 R2.2 1681,533.95 1681,788.86 1722,829.86 1722,5081.14 1703.93,5099.22 1683.78,5099.22 1679,5104 1679,5104.05 1672,5111.05 1672,5432 1685,5445 1706,5445 1717,5456 1717,5493.92 D2.G12 ; R2.2@1714.14,503 R2.2@1721.71,503
OUTCTR_P: D1.3 D2.H12 R2.1 | length 5682.8
  LVDS w5: D1.3 1240.18,247.96 1247.98,255.76 1247.98,311.12 1265.86,329 1539,329 1658,448 1658,476.71 1636.59,498.12 R2.1@1631.71,503 ; R2.1 1671,532.54 1671,793 1712,834 1712,5077 1699.78,5089.22 1679.64,5089.22 1669,5099.86 1669,5099.91 1662,5106.91 1662,5438.92 D2.H12
RAMP: C14.2 D2.T16 | length 354.9
  LVDS w20: D2.T16 v1(1917,5043.92)
  CMOS w5: C14.2 1821.29,4809.29 1941,4929 1941,4953.92 1917,4977.92 v1(1917,5043.92)
REF_ADC: C16.2 D2.V14 | length 220.4
  LVDS w20: v1(1767,4993.92) D2.V14
  CMOS w5: C16.2 1752.86,4894.92 1790,4932.06 1790,4970.92 v1(1767,4993.92)
SG_ADC: C17.2 D2.T15 | length 479
  LVDS w20: D2.T15 v1(1867,5043.92)
  CMOS w5: C17.2 1691.71,4711.63 1735,4754.92 1735,4847.92 1811,4923.92 1811,4987.92 v1(1867,5043.92)
SPI_CLK: D2.K18 P6.9 X2.5 | length 6381.2
  LVDS w10: X2.5 647,2005 894.18,1757.82 P6.9
  LVDS w20: v1(1967,5393.92) D2.K18
  CMOS w10: P6.9 1918.29,1757.82 2750,2589.53 2750,5279 2564,5465 2038.08,5465 v1(1967,5393.92)
SPI_EN: D2.K17 P6.8 X2.25 | length 6735.8
  LVDS w10: X2.25 318,1869 401,1952 581,1952 875.18,1657.82 P6.8
  LVDS w20: v1(1917,5393.92) D2.K17
  CMOS w10: P6.8 1850.82,1657.82 2773,2580 2773,5288 2581,5480 2020,5480 1933.92,5393.92 v1(1917,5393.92)
SPI_IN: D2.J16 P6.6 X2.7 | length 6830.9
  LVDS w10: X2.7 519,1787 848.18,1457.82 P6.6
  LVDS w20: v1(1867,5443.92) D2.J16
  CMOS w10: P6.6 1720.12,1457.82 2822,2559.7 2822,5302 2614,5510 2003,5510 1972,5479 1902.08,5479 v1(1867,5443.92)
SPI_OUT: D2.K16 P6.7 X2.30 | length 7327.8
  LVDS w10: X2.30 374,1352 374,1816 400,1842 574,1842 858.18,1557.82 P6.7
  LVDS w20: v1(1867,5393.92) D2.K16
  CMOS w10: P6.7 1784.76,1557.82 2797,2570.06 2797,5293 2595,5495 2013,5495 1981,5463 1936.08,5463 v1(1867,5393.92)
SYS_RES_N: D2.L18 P6.10 X2.23 | length 6294.7
  LVDS w10: X2.23 722,2059 923.18,1857.82 P6.10
  LVDS w20: v1(1967,5343.92) D2.L18
  CMOS w10: P6.10 1985.77,1857.82 2727,2599.05 2727,5267.36 2650.44,5343.92 v1(1967,5343.92)
TH_RES: TH1.1 TH2.1 X4.3 | length 5801.3
  CMOS w20: X4.3 71,3604.04 71,5261 TH2.1 700,5890 2669,5890 3076,5483 TH1.1
VBGAP: C28.2 D2.U17 | length 671.8
  LVDS w20: D2.U17 v1(1967,4993.92)
  CMOS w10: v1(1967,4993.92) 2057,4903.92 2057,4675.21 C28.2
VDD20: C6.2 C7.2 D2.K15 D2.N11 D2.N13 D2.N15 D2.P15 X1.1 | length 2449.4
  LVDS w20: v1(1617,5243.92) D2.N11 ; v1(1717,5243.92) D2.N13 ; v1(1817,5243.92) D2.N15 ; v1(1817,5393.92) D2.K15 ; D2.P15 v1(1867,5143.92)
  CMOS w20: X1.1 323.96,4568 765.79,4568 C7.2 1442.29,5243.92 v1(1617,5243.92) v1(1717,5243.92) 1762,5243.92 ; v1(1817,5393.92) 1788.92,5393.92 1767,5372 1767,5248.92 1762,5243.92 ; v1(1867,5143.92) 1867,5193.92 v1(1817,5243.92) 1762,5243.92
VDD33: C10.2 C11.2 C12.1 C13.1 C14.1 C15.1 D2.G18 D2.H15 D2.M18 X1.2 | length 809.5
  LVDS w20: v1(1817,5493.92) D2.H15 ; v1(1967,5293.92) D2.M18 ; v1(1967,5543.92) D2.G18
  CMOS w6: C13.1 2226.29,5442.92 2358.29,5442.92 C12.1 2407.29,5393.92 v1(2517,5393.92)
  CMOS w20: C14.1 1917,4789.63 v1(1917,4843.92) ; C10.2 C11.2 1967,5610.79 v1(1967,5543.92) ; C15.1 2361.29,4793.92 v1(2417,4793.92)
VDDPIX: C8.2 C9.2 D2.G17 D2.M15 D2.V17 X3.1 | length 4029.9
  LVDS w20: v1(1817,5293.92) D2.M15 ; v1(1917,5543.92) D2.G17 ; D2.V17 v1(1967,4943.92)
  CMOS w5: C9.2 C9.2@1568.29,5518.92 ; 1942,4968.92 v1(1967,4943.92)
  CMOS w8: C9.2@1568.29,5518.92 1892,5518.92 v1(1917,5543.92) ; 1842,5518.92 1842,5318.92 v1(1817,5293.92) 1841.92,5269 1891,5269 1942,5218 1942,4969.18 1967,4944.18 v1(1967,4943.92)
  CMOS w20: X3.1 330.96,3782 1489,3782 1967,4260 v1(1967,4943.92)
  CMOS w25: C8.2 C9.2
VPCH_H: C20.2 D2.M16 | length 758.3
  LVDS w20: v1(1867,5293.92) D2.M16
  CMOS w5: v1(1867,5293.92) 1897,5323.92 2516.71,5323.92 C20.2
VRAMP1: C18.2 D2.U15 | length 540
  LVDS w20: D2.U15 v1(1867,4993.92)
  CMOS w5: C18.2 1691.71,4600.63 1746,4654.92 1746,4842.92 1821,4917.92 1821,4947.92 v1(1867,4993.92)
VRAMP2: C19.2 D2.V15 | length 599.3
  LVDS w20: D2.V15 v1(1867,4943.92)
  CMOS w5: C19.2 1759,4514.21 1759,4835.92 v1(1867,4943.92)
VREF: C24.2 D2.U14 | length 357.9
  LVDS w20: v1(1767,5043.92) D2.U14
  CMOS w5: C24.2 1693.71,4781.92 1693.71,4821.63 1800,4927.92 1800,5010.92 v1(1767,5043.92)
VRES_H: C4.2 C5.2 D2.N16 X3.2 | length 2394.3
  LVDS w20: v1(1867,5243.92) D2.N16
  CMOS w5: C5.2@1702.6,5124.61 1706.58,5120.63 C5.2@1712.21,5115
  CMOS w10: C5.2 1706.58,5120.63 1882.63,5120.63 1892,5130 1892,5218.92 v1(1867,5243.92)
  CMOS w20: X3.2 297,4196 297,4346 434,4483 816,4483 1453.63,5120.63 C4.2
  CMOS w25: C4.2 C5.2
VRES_L: C21.2 D2.P18 | length 272.6
  LVDS w20: D2.P18 v1(2017,5143.92)
  CMOS w10: v1(2017,5143.92) C21.2@2254.29,5143.92
VTF_L2: C22.2 D2.P16 | length 699.1
  LVDS w20: D2.P16 v1(1917,5143.92)
  CMOS w5: C22.2 1771,4613.21 1771,4819.92 1887,4935.92 1887,5096.61 1917,5126.61 v1(1917,5143.92)
VTF_L3: C23.2 D2.R18 | length 378.5
  LVDS w20: D2.R18 v1(2017,5093.92)
  CMOS w10: v1(2017,5093.92) 2139,5093.92 2176,5056.92 2176,5000.21 C23.2
pads on no net: D2.A3 D2.A4 D2.A5 D2.A6 D2.A7 D2.A8 D2.A9 D2.A10 D2.A11 D2.A12 D2.A13 D2.A14 D2.A15 D2.A16 D2.A17 D2.A18 D2.A19 D2.A20 D2.A21 D2.A22 D2.A23 D2.A24 D2.A25 D2.A26 D2.A27 D2.A28 D2.A29 D2.AA1 D2.AA2 D2.AA3 D2.AA4 D2.AA5 D2.AA6 D2.AA7 D2.AA8 D2.AA9 D2.AA10 D2.AA11 D2.AA12 D2.AA13 D2.AA14 D2.AA15 D2.AA16 D2.AA17 D2.AA18 D2.AA19 D2.AA20 D2.AA21 D2.AA22 D2.AA23 D2.AA24 D2.AA25 D2.AA26 D2.AA27 D2.AA28 D2.AA29 D2.AA30 D2.AA31 D2.AB1 D2.AB2 D2.AB3 D2.AB4 D2.AB5 D2.AB6 D2.AB7 D2.AB8 D2.AB9 D2.AB10 D2.AB11 D2.AB12 D2.AB13 D2.AB14 D2.AB15 D2.AB16 D2.AB17 D2.AB18 D2.AB19 D2.AB20 D2.AB21 D2.AB22 D2.AB23 D2.AB24 D2.AB25 D2.AB26 D2.AB27 D2.AB28 D2.AB29 D2.AB30 D2.AB31 D2.AC1 D2.AC2 D2.AC3 D2.AC4 D2.AC5 D2.AC6 D2.AC7 D2.AC8 D2.AC9 D2.AC10 D2.AC11 D2.AC12 D2.AC13 D2.AC14 D2.AC15 D2.AC16 D2.AC17 D2.AC18 D2.AC19 D2.AC20 D2.AC21 D2.AC22 D2.AC23 D2.AC24 D2.AC25 D2.AC26 D2.AC27 D2.AC28 D2.AC29 D2.AC30 D2.AC31 D2.AD1 D2.AD2 D2.AD3 D2.AD4 D2.AD5 D2.AD6 D2.AD7 D2.AD8 D2.AD9 D2.AD10 D2.AD11 D2.AD12 D2.AD13 D2.AD14 D2.AD15 D2.AD16 D2.AD17 D2.AD18 D2.AD19 D2.AD20 D2.AD21 D2.AD22 D2.AD23 D2.AD24 D2.AD26 D2.AD27 D2.AD28 D2.AD29 D2.AD30 D2.AD31 D2.AE1 D2.AE2 D2.AE3 D2.AE4 D2.AE5 D2.AE6 D2.AE7 D2.AE8 D2.AE9 D2.AE10 D2.AE11 D2.AE12 D2.AE13 D2.AE14 D2.AE15 D2.AE16 D2.AE17 D2.AE18 D2.AE19 D2.AE20 D2.AE21 D2.AE22 D2.AE23 D2.AE24 D2.AE26 D2.AE27 D2.AE28 D2.AE29 D2.AE30 D2.AE31 D2.AF1 D2.AF2 D2.AF3 D2.AF4 D2.AF5 D2.AF6 D2.AF7 D2.AF8 D2.AF9 D2.AF10 D2.AF11 D2.AF12 D2.AF13 D2.AF14 D2.AF15 D2.AF16 D2.AF17 D2.AF18 D2.AF19 D2.AF20 D2.AF21 D2.AF22 D2.AF23 D2.AF24 D2.AF25 D2.AF26 D2.AF27 D2.AF28 D2.AF29 D2.AF30 D2.AF31 D2.AG1 D2.AG2 D2.AG3 D2.AG4 D2.AG5 D2.AG6 D2.AG7 D2.AG8 D2.AG9 D2.AG10 D2.AG11 D2.AG12 D2.AG13 D2.AG14 D2.AG15 D2.AG16 D2.AG17 D2.AG18 D2.AG19 D2.AG20 D2.AG21 D2.AG22 D2.AG23 D2.AG24 D2.AG25 D2.AG26 D2.AG27 D2.AG28 D2.AG29 D2.AG30 D2.AG31 D2.AH1 D2.AH2 D2.AH3 D2.AH4 D2.AH5 D2.AH6 D2.AH7 D2.AH9 D2.AH10 D2.AH11 D2.AH12 D2.AH13 D2.AH14 D2.AH15 D2.AH16 D2.AH17 D2.AH18 D2.AH19 D2.AH20 D2.AH21 D2.AH22 D2.AH23 D2.AH24 D2.AH25 D2.AH26 D2.AH27 D2.AH28 D2.AH29 D2.AH30 D2.AH31 D2.AJ1 D2.AJ2 D2.AJ3 D2.AJ4 D2.AJ5 D2.AJ6 D2.AJ7 D2.AJ9 D2.AJ10 D2.AJ11 D2.AJ12 D2.AJ13 D2.AJ14 D2.AJ15 D2.AJ16 D2.AJ17 D2.AJ18 D2.AJ19 D2.AJ20 D2.AJ21 D2.AJ22 D2.AJ23 D2.AJ24 D2.AJ25 D2.AJ26 D2.AJ27 D2.AJ28 D2.AJ29 D2.AJ30 D2.AJ31 D2.AK3 D2.AK4 D2.AK5 D2.AK6 D2.AK7 D2.AK8 D2.AK9 D2.AK10 D2.AK11 D2.AK12 D2.AK13 D2.AK14 D2.AK15 D2.AK16 D2.AK17 D2.AK18 D2.AK19 D2.AK20 D2.AK21 D2.AK22 D2.AK23 D2.AK24 D2.AK25 D2.AK26 D2.AK27 D2.AK28 D2.AK29 D2.AK30 D2.AL3 D2.AL4 D2.AL5 D2.AL6 D2.AL7 D2.AL8 D2.AL9 D2.AL10 D2.AL11 D2.AL12 D2.AL13 D2.AL14 D2.AL15 D2.AL16 D2.AL17 D2.AL18 D2.AL19 D2.AL20 D2.AL21 D2.AL22 D2.AL23 D2.AL24 D2.AL25 D2.AL26 D2.AL27 D2.AL28 D2.AL29 D2.B2 D2.B3 D2.B4 D2.B5 D2.B6 D2.B7 D2.B8 D2.B9 D2.B10 D2.B11 D2.B12 D2.B13 D2.B14 D2.B15 D2.B16 D2.B17 D2.B18 D2.B19 D2.B20 D2.B21 D2.B22 D2.B23 D2.B24 D2.B25 D2.B26 D2.B27 D2.B28 D2.B29 D2.B30 D2.C1 D2.C2 D2.C3 D2.C4 D2.C5 D2.C6 D2.C7 D2.C8 D2.C9 D2.C10 D2.C11 D2.C12 D2.C13 D2.C14 D2.C15 D2.C16 D2.C17 D2.C18 D2.C19 D2.C20 D2.C21 D2.C22 D2.C23 D2.C24 D2.C25 D2.C26 D2.C27 D2.C28 D2.C29 D2.C30 D2.C31 D2.D1 D2.D2 D2.D3 D2.D4 D2.D5 D2.D6 D2.D7 D2.D8 D2.D9 D2.D10 D2.D11 D2.D12 D2.D13 D2.D14 D2.D15 D2.D16 D2.D17 D2.D18 D2.D19 D2.D20 D2.D21 D2.D22 D2.D23 D2.D24 D2.D25 D2.D26 D2.D27 D2.D28 D2.D29 D2.D30 D2.D31 D2.E1 D2.E2 D2.E3 D2.E4 D2.E5 D2.E6 D2.E7 D2.E8 D2.E9 D2.E10 D2.E11 D2.E12 D2.E13 D2.E14 D2.E15 D2.E16 D2.E17 D2.E18 D2.E19 D2.E20 D2.E21 D2.E22 D2.E23 D2.E24 D2.E25 D2.E26 D2.E27 D2.E28 D2.E29 D2.E30 D2.E31 D2.F1 D2.F2 D2.F3 D2.F4 D2.F5 D2.F6 D2.F7 D2.F8 D2.F9 D2.F10 D2.F11 D2.F12 D2.F13 D2.F14 D2.F15 D2.F16 D2.F17 D2.F18 D2.F19 D2.F20 D2.F21 D2.F22 D2.F23 D2.F24 D2.F25 D2.F26 D2.F27 D2.F28 D2.F29 D2.F30 D2.F31 D2.G1 D2.G2 D2.G3 D2.G4 D2.G5 D2.G6 D2.G7 D2.G8 D2.G9 D2.G10 D2.G11 D2.G14 D2.G19 D2.G20 D2.G21 D2.G22 D2.G23 D2.G24 D2.G25 D2.G26 D2.G27 D2.G28 D2.G29 D2.G30 D2.G31 D2.H1 D2.H2 D2.H3 D2.H4 D2.H5 D2.H6 D2.H7 D2.H8 D2.H9 D2.H10 D2.H11 D2.H14 D2.H17 D2.H18 D2.H19 D2.H20 D2.H21 D2.H22 D2.H23 D2.H24 D2.H25 D2.H26 D2.H27 D2.H28 D2.H29 D2.H30 D2.H31 D2.J1 D2.J2 D2.J3 D2.J4 D2.J5 D2.J6 D2.J7 D2.J8 D2.J9 D2.J10 D2.J11 D2.J12 D2.J14 D2.J17 D2.J18 D2.J19 D2.J20 D2.J21 D2.J22 D2.J23 D2.J24 D2.J25 D2.J26 D2.J27 D2.J28 D2.J29 D2.J30 D2.J31 D2.K1 D2.K2 D2.K3 D2.K4 D2.K5 D2.K6 D2.K7 D2.K8 D2.K9 D2.K10 D2.K11 D2.K12 D2.K13 D2.K14 D2.K19 D2.K20 D2.K21 D2.K22 D2.K23 D2.K24 D2.K25 D2.K26 D2.K27 D2.K28 D2.K29 D2.K30 D2.K31 D2.L1 D2.L2 D2.L3 D2.L4 D2.L5 D2.L6 D2.L7 D2.L9 D2.L10 D2.L11 D2.L12 D2.L13 D2.L14 D2.L19 D2.L20 D2.L21 D2.L22 D2.L23 D2.L24 D2.L25 D2.L26 D2.L27 D2.L28 D2.L29 D2.L30 D2.L31 D2.M1 D2.M2 D2.M3 D2.M4 D2.M5 D2.M6 D2.M7 D2.M9 D2.M10 D2.M12 D2.M14 D2.M19 D2.M20 D2.M21 D2.M22 D2.M23 D2.M24 D2.M25 D2.M26 D2.M27 D2.M28 D2.M29 D2.M30 D2.M31 D2.N1 D2.N2 D2.N3 D2.N4 D2.N5 D2.N6 D2.N7 D2.N8 D2.N9 D2.N10 D2.N12 D2.N17 D2.N19 D2.N20 D2.N21 D2.N22 D2.N23 D2.N25 D2.N26 D2.N27 D2.N28 D2.N29 D2.N30 D2.N31 D2.P1 D2.P2 D2.P3 D2.P4 D2.P5 D2.P6 D2.P7 D2.P8 D2.P9 D2.P10 D2.P11 D2.P12 D2.P13 D2.P19 D2.P20 D2.P21 D2.P22 D2.P23 D2.P25 D2.P26 D2.P27 D2.P28 D2.P29 D2.P30 D2.P31 D2.R1 D2.R2 D2.R3 D2.R4 D2.R5 D2.R6 D2.R7 D2.R8 D2.R9 D2.R10 D2.R11 D2.R12 D2.R13 D2.R14 D2.R19 D2.R20 D2.R21 D2.R22 D2.R23 D2.R24 D2.R25 D2.R26 D2.R27 D2.R28 D2.R29 D2.R30 D2.R31 D2.T1 D2.T2 D2.T3 D2.T4 D2.T5 D2.T6 D2.T7 D2.T8 D2.T9 D2.T10 D2.T11 D2.T12 D2.T13 D2.T14 D2.T19 D2.T20 D2.T21 D2.T22 D2.T23 D2.T24 D2.T25 D2.T26 D2.T27 D2.T28 D2.T29 D2.T30 D2.T31 D2.U1 D2.U2 D2.U3 D2.U4 D2.U5 D2.U6 D2.U7 D2.U8 D2.U9 D2.U10 D2.U11 D2.U13 D2.U16 D2.U19 D2.U20 D2.U21 D2.U22 D2.U23 D2.U24 D2.U25 D2.U26 D2.U27 D2.U28 D2.U29 D2.U30 D2.U31 D2.V1 D2.V2 D2.V3 D2.V4 D2.V5 D2.V6 D2.V7 D2.V8 D2.V9 D2.V10 D2.V18 D2.V19 D2.V20 D2.V21 D2.V22 D2.V23 D2.V24 D2.V25 D2.V26 D2.V27 D2.V28 D2.V29 D2.V30 D2.V31 D2.W1 D2.W2 D2.W3 D2.W4 D2.W5 D2.W6 D2.W7 D2.W8 D2.W9 D2.W10 D2.W11 D2.W12 D2.W13 D2.W14 D2.W15 D2.W16 D2.W17 D2.W18 D2.W19 D2.W20 D2.W21 D2.W22 D2.W23 D2.W24 D2.W25 D2.W26 D2.W27 D2.W28 D2.W29 D2.W30 D2.W31 D2.Y1 D2.Y2 D2.Y3 D2.Y4 D2.Y5 D2.Y6 D2.Y7 D2.Y8 D2.Y9 D2.Y10 D2.Y11 D2.Y12 D2.Y13 D2.Y14 D2.Y15 D2.Y16 D2.Y17 D2.Y18 D2.Y19 D2.Y20 D2.Y21 D2.Y22 D2.Y23 D2.Y24 D2.Y25 D2.Y26 D2.Y27 D2.Y28 D2.Y29 D2.Y30 D2.Y31 X1.3 X2.1 X2.2 X2.3 X2.8 X2.9 X2.17 X2.18 X2.19 X2.20 X2.21 X2.22 X2.26 X2.27 X2.28 X2.31 X2.32 X2.33 X2.35 X2.36 X2.37 X3.3 X4.2

## Polygon pours and split planes (outlines as drawn)
GND on GND (split plane): 3815.9,20.1 20.1,20.1 20.1,6345.86 3815.9,6345.86
VDD33 on VDD33 (split plane): 3815.9,20.1 20.1,20.1 20.1,6345.86 3815.9,6345.86

## Keep-outs
Keep-Out Layer:
  the board outline again, w10

## Other copper
GND (plane layer: these items are gaps in the copper):
  pour cut-out: 1917,5093.92 1917,5043.92 1967,4993.92 2017,4993.92 2017,5093.92
  pour cut-out: 1867,5393.92 1867,5293.92 1967,5293.92 1967,5393.92
  pour cut-out: 1817,5293.92 1817,5243.92 1867,5243.92 1867,5293.92
VDD33 (plane layer: these items are gaps in the copper):
  pour cut-out: 1867,5143.92 1867,4943.92 1967,4943.92 2017,4993.92 2017,5143.92
  pour cut-out: 1817,5443.92 1817,5243.92 1917,5243.92 1917,5393.92 1867,5443.92
  pour cut-out: 1917,5393.92 1917,5343.92 1967,5343.92 1967,5393.92

## Silkscreen, mask and mechanical layers (free items; w line width, h text height)
Top Overlay:
  lines w10: 1046,4260.35 1046,4319 1046,6254 2739,6254 2739,4260.35 1046,4260.35
  text "С обратной стороны" at 572,3741 h78.74 r90
  text "CMV4000" at 1586.87,3481 h99.37
  text "НТК-4 ВПЛ" at 1568,2447 h157.48
  text "CLK" at 507,2084 h60
  text "Укоротить" at 990,1952 h78.74
  text "SYS_RES_N" at 1142,1833 h60
  text "SPI_CLK" at 1142,1732.22 h60
  text "SPI_EN" at 1142,1631.44 h60
  text "SPI_OUT" at 1142,1530.67 h60
  text "SPI_IN" at 1142,1429.89 h60
  text "FRAME_REQ" at 1142,1329.11 h60
  text "OUT_D9" at 1142,1228.33 h60
  text "OUT_D1" at 1142,1127.56 h60
  text "OUT_CTR" at 1142,1026.78 h60
  text "OUT_CLK" at 1142,926 h60
Bottom Overlay:
  text "0" at 316,5227 h60
  text "1" at 306,4434 h60
  text "2" at 316,3677 h60